# EAGLE board Quad_ESC_controller (EAGLE 9.6.2)
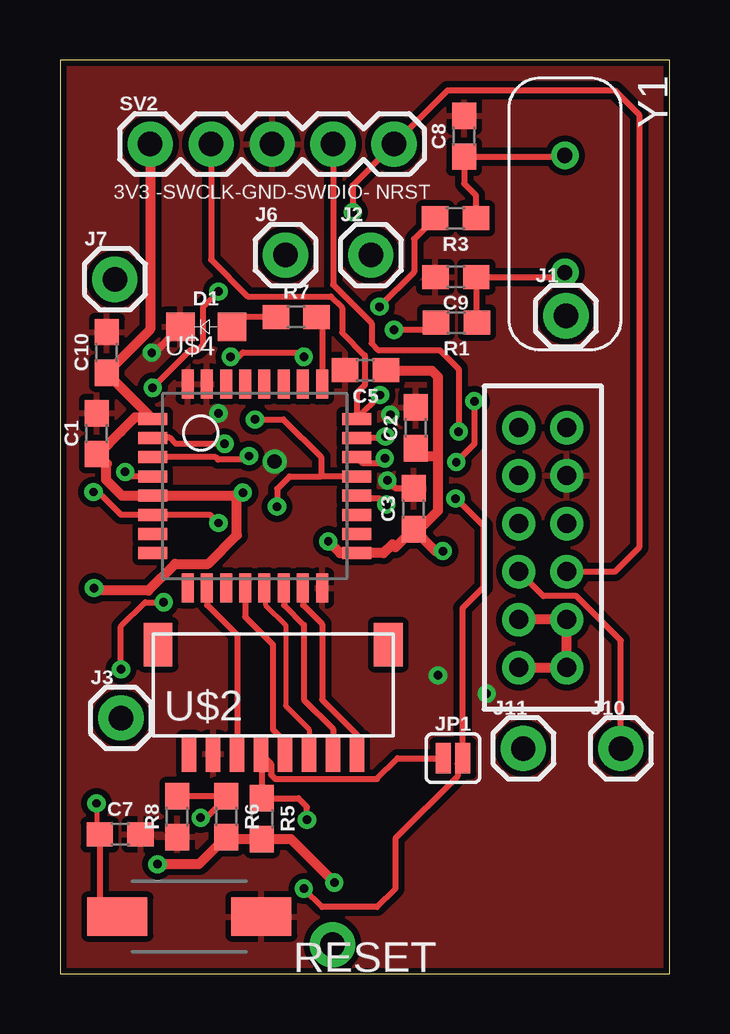
[diagram p0: board, top side]
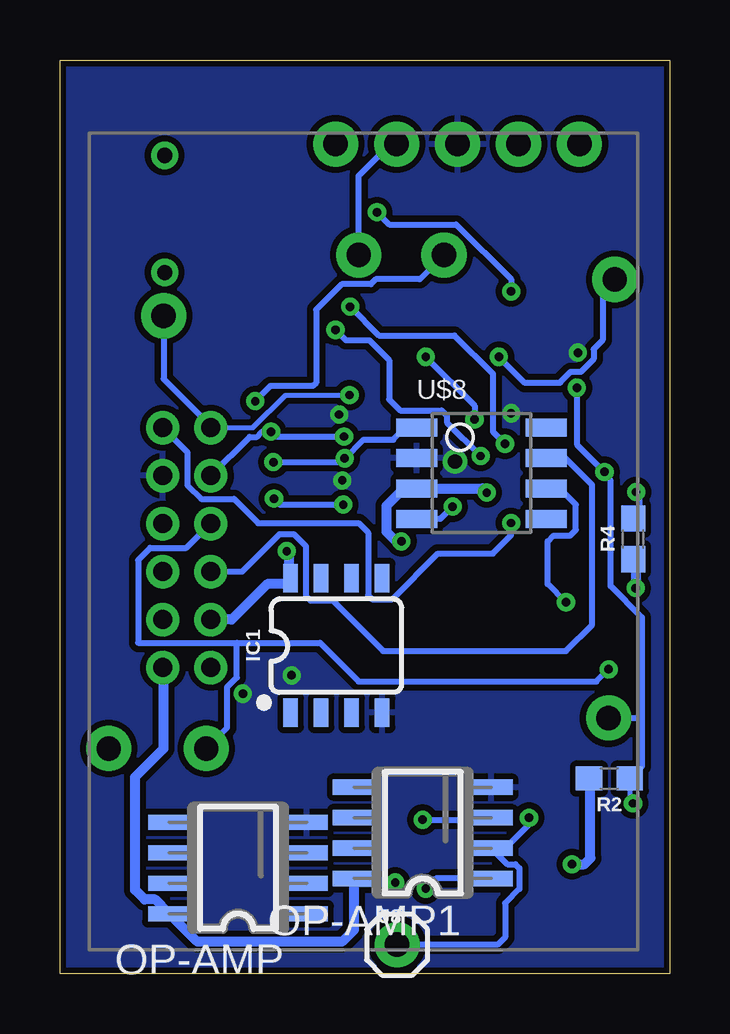
[diagram p1: board, bottom side, seen from below]

Size 25.4 x 38.1 mm. Coordinates in mm from the lower left corner, seen from the top.
Outline: 0,0 25.4,0 25.4,38.1 0,38.1 0,0
Copper layers (1*16): Top 0.035mm / dielectric 1.5mm / Bottom 0.035mm
Design rules "477 *": minimum track width 6mil, minimum drill 0.35mm, track to track 6mil, track to pad 6mil, pad to pad 6mil, via to via 6mil, smd to smd 6mil, copper to edge 10mil, drill to drill 6mil, minimum pad ring 10mil, minimum via ring 8mil, stop-mask expansion 4mil, vias tented up to drill 0mil, thermal gap 10mil
Net classes: 0 default: width 0.203 mm

## Footprints (pad centres in the part's own frame; a part is rotated, then mirrored left to right if it is on the bottom)
0603 = smd 1.1 x 1: 1 -0.85,0; 2 0.85,0
0805 = smd 1.2 x 1.2: A 1.1,0; C -1.05,0
SO08 = smd 0.6 x 1.2: 1 -1.905,-2.8; 2 -0.635,-2.8; 3 0.635,-2.8; 4 1.905,-2.8; 5 1.905,2.8; 6 0.635,2.8; 7 -0.635,2.8; 8 -1.905,2.8
1X01 = drill 1.016 pad 1.88: 1 0,0
SMT-JUMPER_2_NO_SILK = smd 0.635 x 1.27: 1 -0.406,0; 2 0.406,0
SO08' = smd 0.635 x 1.778: 1 -1.905,-2.857; 2 -0.635,-2.857; 3 0.635,-2.857; 4 1.905,-2.857; 5 1.905,2.857; 6 0.635,2.857; 7 -0.635,2.857; 8 -1.905,2.857
DISCRETECOMPONENTS_SW_2512 = smd 2.5 x 1.6: 1 -3,0; 2 3,0
1X05 = drill 1.016 pad 1.88: 1 0,0; 2 2.54,0; 3 5.08,0; 4 7.62,0; 5 10.16,0
8PIN_CONNECTOR = smd 0.6 x 1.5: 1 1.5,-0.75; 2 2.5,-0.75; 3 3.5,-0.75; 4 4.5,-0.75; 5 5.5,-0.75; 6 6.5,-0.75; 7 7.5,-0.75; 8 8.5,-0.75 | smd 1.2 x 1.8: MECH1 0.2,3.81; MECH2 9.8,3.81
BACKPLANE_CONNECTORS_ESC = drill 0.79 pad 1.39: 1 -1,-5; 2 1,-5; 3 -1,-3; 4 1,-3; 5 -1,-1; 6 1,-1; 7 -1,1; 8 1,1; 9 -1,3; 10 1,3; 11 -1,5; 12 1,5
STM32F042K6T6 = smd 1.2 x 0.5: NRST 0,3.2; PA0 0,1.6; PA1 0,0.8; PA2 0,0; PA8 8.5,0.8; PA9 8.5,1.6; PA10 8.5,2.4; PA11 8.5,3.2; PA12 8.5,4; PA13 8.5,4.8; PA14 8.5,5.6; PF0-OSC_IN 0,4.8; PF1-OSC_OUT 0,4; VDD 0,5.6; VDDA 0,2.4; VDDIO2 8.5,0 | smd 0.5 x 1.2: PA3 1.45,-1.45; PA4 2.25,-1.45; PA5 3.05,-1.45; PA6 3.85,-1.45; PA7 4.65,-1.45; PA15 7.05,7.05; PB0 5.45,-1.45; PB1 6.25,-1.45; PB3 6.25,7.05; PB4 5.45,7.05; PB5 4.65,7.05; PB6 3.85,7.05; PB7 3.05,7.05; PB8-BOOT0 2.25,7.05; VSS 7.05,-1.45; VSS1 1.45,7.05
TCAN337D = smd 1.7 x 0.75: CANH 5.4,2.54; CANL 5.4,1.27; FAULT 5.4,0; GND 0,2.54; RXD 0,0; S 5.4,3.81; TXD 0,3.81; VCC 0,1.27
XTAL_ECS-80-S-4X = drill 0.63 pad 1.03: 1 -2.44,0; 2 2.44,0

## Placement (x,y rotation side)
C1  4.7uF  [0603]  1.53,22.52 90 top
C2  0.1uF  [0603]  14.83,22.77 90 top
C3  0.1uF  [0603]  14.73,19.39 90 top
C5  0.1uF  [0603]  12.73,25.17 180 top
C7  4.7uF  [0603]  2.5,5.82 0 top
C8  20pF  [0603]  16.84,34.92 90 top
C9  20pF  [0603]  16.49,29.06 180 top
C10  0.1uF  [0603]  1.95,25.91 90 top
D1  COLOR  [0805]  6.07,26.98 0 top
IC1  OP-AMP  [SO08]  13.89,13.69 0 bottom
J1  [1X01]  21.08,27.43 0 top
J2  [1X01]  12.95,29.97 0 top
J3  [1X01]  2.54,10.67 0 top
J6  [1X01]  9.4,29.97 0 top
J7  [1X01]  2.29,28.96 0 top
J8  [1X01]  11.35,1.22 0 bottom
J10  [1X01]  23.37,9.4 0 top
J11  [1X01]  19.3,9.4 0 top
JP1  JUMPER-SMT_2_NO_SILK  [SMT-JUMPER_2_NO_SILK]  16.38,8.99 0 top
OP-AMP  LM2904S  [SO08']  17.98,4.41 90 bottom
OP-AMP1  LM2904S  [SO08']  10.29,5.88 90 bottom
R1  0  [0603]  16.52,27.15 180 top
R2  1k  [0603]  2.51,8.15 180 bottom
R3  0  [0603]  16.48,31.5 180 top
R4  10k  [0603]  1.52,18.14 90 bottom
R5  1k  [0603]  8.41,6.47 270 top
R6  1k  [0603]  6.92,6.56 270 top
R7  470  [0603]  9.84,27.38 0 top
R8  3.3k  [0603]  4.89,6.56 90 top
RESET  DISCRETECOMPONENTS_SWITCH  [DISCRETECOMPONENTS_SW_2512]  5.39,2.39 180 top
SV2  3V3 -SWCLK-GND-SWDIO- NRST  [1X05]  3.76,34.59 0 top
U$2  JST-8PIN  [8PIN_CONNECTOR]  3.88,9.92 0 top
U$3  BACKPLANE_CONNECTORSESC  [BACKPLANE_CONNECTORS_ESC]  20.12,17.77 0 top
U$4  STM32F042K6T6  [STM32F042K6T6]  3.87,17.54 0 top
U$8  TCAN337D  [TCAN337D]  10.54,18.97 0 bottom
Y1  ECS-80-S-4X  [XTAL_ECS-80-S-4X]  21.04,31.68 270 top

## Library data of the parts
C1-C3 C5 C7-C10 = SparkFun-Capacitors; PROD_ID: CAP-08280
D1 = LED, 0805
IC1 = SparkFun-IC-Amplifiers; PROD_ID: NA-XXXXX
J1-J3 J6-J8 J10 J11 = SparkFun-Connectors
JP1 = SparkFun-Jumpers
OP-AMP OP-AMP1 = IC, LM2904; AVAILABILITY: In Stock; DESCRIPTION: General Purpose Amplifier 2 Circuit - 8-SOIC; MF: Texas Instruments; MP: LM2904; PACKAGE: None; PRICE: None; PURCHASE-URL: https://pricing.snapeda.com/search/part/LM2904/?ref=eda
R1-R3 = SparkFun-Resistors; PROD_ID: RES-07856
R4 = SparkFun-Resistors; PROD_ID: RES-00824
R5-R8 = SparkFun-Resistors
RESET = Push button - FSM2JMTR
SV2 = CONN, Serial Wire Programming Headers
U$2 = JST 8 pin
U$3 = BLHeli_32 45A
U$4 U$8 = PI_Shield_Library
Y1 = ECS-80-S-4X; DESCRIPTION: Crystal 8MHz Series 2-Pin HC-49/U; DIGI-KEY_PART_NUMBER: X1057-ND; DIGI-KEY_PURCHASE_URL: https://www.digikey.com/product-detail/en/ecs-inc/ECS-80-S-4X/X1057-ND/827549?utm_source=snapeda&utm_medium=aggregator&utm_campaign=symbol; MF: ECS International; MP: ECS-80-S-4X; PACKAGE: HC-49/US ECS International

## Nets
+3V3: C1.1 C2.1 C3.1 C5.1 C10.1 IC1.8 OP-AMP1.8 OP-AMP.8 R2.2 R4.1 R5.2 R6.2 SV2.1 U$3.1 U$3.2 U$3.3 U$3.4 U$4.VDD U$4.VDDA U$4.VDDIO2 U$8.VCC
ADC: U$2.3 U$4.PA4
CAN_H: J10.1 U$3.5 U$8.CANH
CAN_L: J11.1 U$3.7 U$8.CANL
CAN_RX: J7.1 U$4.PA11 U$8.RXD
CAN_TX: J6.1 U$4.PA12 U$8.TXD
ESC_ID: R4.2 U$3.12 U$4.PA0
GND: C1.2 C2.2 C3.2 C5.2 C7.2 C8.2 C9.2 C10.2 D1.C IC1.4 OP-AMP1.4 OP-AMP.4 R8.1 RESET.1 SV2.3 U$2.2 U$3.10 U$4.PB8-BOOT0 U$4.VSS U$4.VSS1 U$8.GND
LED: R7.2 U$4.PA15
N$1: C9.1 R1.1 Y1.2
N$2: C8.1 R3.1 Y1.1
N$6: J8.1 OP-AMP1.2 R6.1 R8.2
N$24: D1.A R7.1
NRST: C7.1 J3.1 R2.1 RESET.2 SV2.5 U$3.6 U$4.NRST
OSC_IN: R3.2 U$4.PF0-OSC_IN
OSC_OUT: R1.2 U$4.PF1-OSC_OUT
SWCLK: J1.1 SV2.2 U$3.11 U$4.PA14
SWDIO: J2.1 SV2.4 U$3.9 U$4.PA13
TIM3_CH1: U$2.5 U$4.PA6
TIM3_CH2: U$2.6 U$4.PA7
TIM3_CH3: U$2.7 U$4.PB0
TIM3_CH4: U$2.8 U$4.PB1
TLM: JP1.2 OP-AMP1.1 U$4.PA10
TLM_ESC: JP1.1 OP-AMP1.3 R5.1 U$2.4

## Tracks (layer width: path | path; a pad name or v marks a point on that pad's centre or on a via)
+3V3  (via drill 0.35)
  Top 0.254: R6.2 7.01,5.62
  Top 0.406: C1.1 1.57,21.64 | 1.57,21.64 1.95,21.26 1.93,21.23 1.93,20.6 2.58,19.94 U$4.VDDA 7.37,19.94 | C2.1 15.15,21.59 15.75,21.59 | 15.75,21.59 15.75,19.3 14.98,18.54 C3.1 | C3.1 13.97,17.78 13.84,17.91 13.48,17.54 U$4.VDDIO2 11.67,17.54 v11.18,18.03 | C5.1 13.6,25.15 15.49,25.15 15.75,24.89 15.75,21.59 | SV2.1 3.76,26.87 C10.1 U$4.VDD 3.81,23.2 3.12,23.2 2.54,22.62 2.54,22.61 1.57,21.64 | U$3.1 U$3.2 U$3.4 U$3.3 | v11.43,3.81 9.62,5.62 R5.2 7.01,5.62 | R6.2 5.78,4.57 v4.06,4.57 | v1.42,16.09 1.52,15.98 3.68,15.98 4.79,17.1 6.18,17.1 7.37,18.29 7.37,19.94 | v15.95,17.63 15.64,17.63 C3.1 | v7.62,20.07 7.5,19.94 7.37,19.94
  Bottom 0.406: 13.14,3.81 13.14,1.84 13.64,1.35 19.68,1.35 OP-AMP.8 21.43,3.11 21.87,3.11 22.27,3.5 22.27,8.21 21.08,9.4 21.08,12.74 U$3.2 | 13.14,3.81 OP-AMP1.8 | U$3.3 18.25,14.77 16.76,16.26 16.03,16.26 IC1.8 15.88,16.58 15.88,17.63 v15.95,17.63 | v11.18,18.03 11.21,18.06 11.43,18.06 11.8,18.43 11.8,19.51 11.07,20.24 U$8.VCC 7.8,20.24 v7.62,20.07 | v11.43,3.81 13.14,3.81 | v4.06,4.57 3.56,4.57 3.3,4.83 3.3,8.09 R2.2 | R4.1 1.42,17.18 v1.42,16.09
ADC
  Top 0.254: U$4.PA4 6.13,16.07 6.13,15.38 7.38,14.13 U$2.3
CAN_H
  Top 0.254: U$3.5 20.14,15.75 21.52,15.75 23.37,13.9 J10.1
  Bottom 0.254: U$3.5 17.81,16.77 16.25,18.34 15.65,18.34 15.15,17.83 15.15,15.75 14.96,15.56 14.04,15.56 11.94,13.46 4.32,13.46 3.23,14.55 3.23,20.39 4.36,21.51 U$8.CANH
CAN_L  (via drill 0.35)
  Top 0.254: v2.54,12.7 2.54,14.48 3.56,15.49 v4.32,15.49
  Bottom 0.254: 18.03,13.8 22.15,13.8 22.15,17.25 21.64,17.76 20.13,17.76 U$3.7 | 18.03,13.8 14.56,13.8 12.95,12.19 3.05,12.19 v2.54,12.7 | v4.32,15.49 5.08,16.26 5.08,18.03 4.84,18.27 4.14,18.27 3.9,18.51 3.9,19.57 4.59,20.25 5.38,20.25 5.37,20.24 U$8.CANL | 18.03,13.8 18.03,12.36 18.44,11.96 18.44,10.26 J11.1
CAN_RX  (via drill 0.35)
  Top 0.254: U$4.PA11 10.88,20.74 | v9.04,19.48 9.04,20.22 9.56,20.74 10.88,20.74 | v7.11,25.72 7.43,25.72 7.62,25.91 9.97,25.91 v10.16,25.72 | v8.13,23.11 9.31,23.11 10.88,21.55 10.88,20.74
  Bottom 0.254: v9.04,19.48 9.55,18.97 U$8.RXD | J7.1 2.79,28.45 2.79,26.42 3.17,26.05 3.17,25.62 3.69,25.09 4.13,25.09 4.52,24.71 4.52,24.69 4.57,24.64 6.03,24.64 v7.11,25.72 | v10.16,25.72 8.13,23.69 v8.13,23.11
CAN_TX  (via drill 0.35)
  Top 0.254: v13.54,21.49 13.33,21.29 12.62,21.29 U$4.PA12 | v17.27,23.88 17.27,22.09 v16.51,21.34
  Bottom 0.254: U$8.TXD 10.99,22.78 11.51,22.27 12.76,22.27 v13.54,21.49 13.7,21.34 v16.51,21.34 | J6.1 10.41,28.96 12.25,28.96 12.45,28.75 13.66,28.75 14.73,27.69 14.73,24.64 14.86,24.51 16.64,24.51 v17.27,23.88
ESC_ID  (via drill 0.35)
  Top 0.254: v6.6,18.8 6.26,19.14 U$4.PA0 2.55,19.14 1.6,20.09 v1.39,20.09
  Bottom 0.254: U$3.12 20.09,21.75 20.09,20.37 19.52,19.8 18.14,19.8 17.14,18.8 12.95,18.8 12.56,18.4 12.56,15.78 12.4,15.61 11.56,15.61 9.65,17.53 7.37,17.53 6.6,18.29 v6.6,18.8 | R4.2 1.27,19.24 1.27,19.97 v1.39,20.09
GND  (via drill 0.35, 0.6)
  Top 0.254: C3.2 14,20.24 13.65,20.59 v13.64,20.57
  Top 0.305: D1.C 3.94,25.89 v3.82,25.89
  other vias: 8.94,21.36 15.75,12.45 17.78,11.68 6.6,23.37 13.77,23.32
  pour Top (isolate 0.254, rank 6): -1.02,38.86 -1.02,-1.02 26.92,-1.02 26.92,38.86
  pour Bottom (isolate 0.254, rank 6): -1.02,38.86 -1.02,-1.02 26.92,-1.02 26.92,38.86
LED
  Top 0.254: R7.2 10.92,27.16 U$4.PA15
N$1
  Top 0.254: Y1.2 20.86,29.06 C9.1 17.34,27.18 R1.1
N$2
  Top 0.254: R3.1 17.33,32.45 16.84,32.95 C8.1 20.99,34.07 Y1.1
N$6  (via drill 0.35)
  Top 0.254: v5.86,6.51 6.09,6.51 6.92,7.35 R6.1 R8.2
  Bottom 0.254: v5.86,6.51 5.86,6.23 6.84,5.25 OP-AMP1.2 6.76,4.57 6.42,4.57 6.26,4.41 6.26,3.54 6.86,2.94 6.86,1.52 7.16,1.22 J8.1
N$24
  Top 0.254: R7.1 7.58,27.38 D1.A
NRST  (via drill 0.35)
  Top 0.203: v1.52,7.11 1.52,5.95
  Top 0.254: 1.52,5.95 C7.1 1.65,3.13 RESET.2 | v12.19,31.75 12.19,32.87 SV2.5 16.15,36.83 23.11,36.83 24.13,35.81 24.13,17.78 23.11,16.76 U$3.6 | v6.6,28.45 5.95,27.8 5.95,26.21 5.74,26 5.42,26 v3.86,24.44 | U$4.NRST 2.9,20.74 v2.71,20.93
  Bottom 0.203: R2.1 1.66,7.25 v1.52,7.11
  Bottom 0.254: R2.1 1.15,8.65 1.15,10.67 | 1.15,10.67 1.15,14.87 2.46,16.17 2.46,20.57 2.71,20.83 v2.71,20.93 3.86,22.08 v3.86,24.44 | v6.6,28.45 6.6,28.96 8.89,31.24 11.68,31.24 v12.19,31.75 | J3.1 1.15,10.67
OSC_IN  (via drill 0.35)
  Top 0.254: R3.2 14.76,30.63 14.76,29.26 v13.31,27.81 | v6.86,22.1 4.83,22.1 4.57,22.35 3.88,22.35 U$4.PF0-OSC_IN
  Bottom 0.254: v13.31,27.81 12.12,26.62 8.97,26.62 7.37,25.02 7.37,22.61 v6.86,22.1
OSC_OUT  (via drill 0.35)
  Top 0.254: R1.2 15.36,26.85 v13.92,26.85 | U$4.PF1-OSC_OUT 6.49,21.54 6.59,21.44 7.72,21.44 v7.87,21.59
  Bottom 0.254: v13.92,26.85 13.49,26.42 12.51,26.42 11.68,25.59 11.68,23.95 11.23,23.49 9.49,23.49 9.28,23.27 9.28,23 v7.87,21.59
SWCLK  (via drill 0.35)
  Top 0.254: SV2.2 6.3,29.77 7.83,28.24 11.28,28.24 11.75,27.77 11.75,26.74 12.71,25.79 12.71,24.56 12.37,24.22 U$4.PA14 12.37,23.16 v13.34,24.13
  Bottom 0.203: U$3.11 19.05,22.77 17.36,22.77 16,24.13 v13.34,24.13
  Bottom 0.254: J1.1 21.08,24.8 19.05,22.77
SWDIO  (via drill 0.35)
  Top 0.254: SV2.4 11.38,28.73 12.98,27.13 12.98,26.29 13.27,26 15.83,26 16.61,25.22 v16.61,22.61 | v13.56,22.4 13.5,22.34 U$4.PA13
  Bottom 0.254: v13.56,22.4 16.41,22.4 v16.61,22.61 16.99,22.61 17.2,22.39 17.5,22.39 U$3.9 | J2.1 12.95,33.27 11.63,34.59 SV2.4
TIM3_CH1
  Top 0.254: U$4.PA6 7.72,14.88 8.87,13.73 8.87,10.19 9.38,9.68 U$2.5
TIM3_CH2
  Top 0.203: U$4.PA7 8.56,16.05 8.56,15.39 9.4,14.55 9.4,11.18 10.38,10.19 U$2.6
TIM3_CH3
  Top 0.254: U$4.PB0 9.34,16.07 9.34,15.38 10.16,14.55 10.16,11.43 11.38,10.21 U$2.7
TIM3_CH4
  Top 0.254: U$4.PB1 10.13,16.07 10.13,15.38 10.92,14.59 10.92,11.43 12.38,9.97 U$2.8
TLM  (via drill 0.35)
  Top 0.254: v10.16,3.56 10.92,2.79 13.21,2.79 13.97,3.56 13.97,5.64 16.57,8.24 16.57,8.78 JP1.2 16.78,15.22 16.76,15.24 17.65,16.13 17.65,18.67 16.51,19.81 v16.48,19.81 | U$4.PA10 12.49,19.82 13.34,19.82 v13.6,19.56
  Bottom 0.254: v10.16,3.56 9.74,3.98 OP-AMP1.1 | v16.48,19.81 16.23,19.56 v13.6,19.56
TLM_ESC  (via drill 0.35)
  Top 0.254: JP1.1 14.07,8.99 13.21,8.13 8.98,8.13 8.8,8.3 8.8,8.75 U$2.4 8.41,9.14 R5.1 9.93,7.32 10.29,6.96 v10.29,6.43
  Bottom 0.254: OP-AMP1.3 7.52,6.43 v10.29,6.43